# EAGLE board Ex EEPROM.SOP16 (EAGLE 7.6.0)
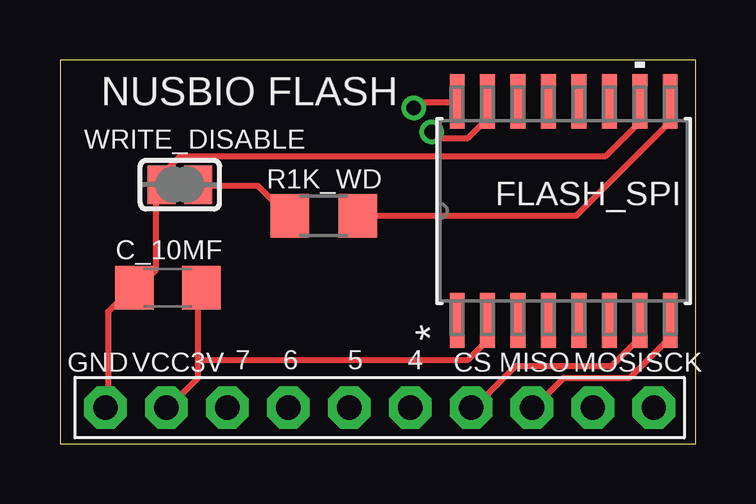
[diagram p0: board, top side]
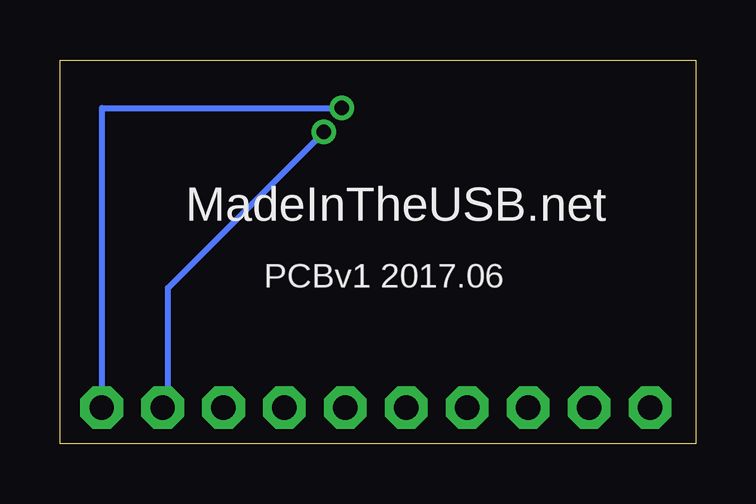
[diagram p1: board, bottom side, seen from below]

Size 26.5 x 16 mm. Coordinates in mm from the lower left corner, seen from the top.
Outline: 0,0 26.5,0 26.5,16 0,16 0,0
Copper layers (1*16): Top 0.035mm / dielectric 1.5mm / Bottom 0.035mm
Design rules "default": minimum track width 10mil, minimum drill 24mil, track to track 8mil, track to pad 8mil, pad to pad 8mil, via to via 8mil, smd to smd 8mil, copper to edge 40mil, drill to drill 8mil, minimum pad ring 10mil, minimum via ring 8mil, stop-mask expansion 4mil, vias tented up to drill 0mil, thermal gap 10mil

## Footprints (pad centres in the part's own frame; a part is rotated, then mirrored left to right if it is on the bottom)
C1206 = smd 1.6 x 1.8: 1 -1.4,0; 2 1.4,0
SL3016-M = smd 2.286 x 0.61: 1 -4.572,4.445; 2 -4.572,3.175; 3 -4.572,1.905; 4 -4.572,0.635; 5 -4.572,-0.635; 6 -4.572,-1.905; 7 -4.572,-3.175; 8 -4.572,-4.445; 9 4.572,-4.445; 10 4.572,-3.175; 11 4.572,-1.905; 12 4.572,-0.635; 13 4.572,0.635; 14 4.572,1.905; 15 4.572,3.175; 16 4.572,4.445
1X10-BIG = drill 1.016 pad 1.778 octagon: 1 -11.43,0; 2 -8.89,0; 3 -6.35,0; 4 -3.81,0; 5 -1.27,0; 6 1.27,0; 7 3.81,0; 8 6.35,0; 9 8.89,0; 10 11.43,0
R1206 = smd 1.6 x 1.803: 1 -1.422,0; 2 1.422,0
SOLDERJUMPER_REFLOW = smd 1.168 x 1.6: 1 -0.762,0; 2 0.762,0

## Placement (x,y rotation side)
C_10MF  [C1206]  4.5,6.5 180 top
FLASH_SPI  S70FL01GSAGMFI011SL3016-M  [SL3016-M]  21,9.7 90 top
NUSBIO_IN  PINHD-1X10  [1X10-BIG]  13.33,1.5 180 top
R1K_WD  [R1206]  11,9.5 0 top
WRITE_DISABLE  [SOLDERJUMPER_REFLOW]  5,10.8 0 top

## Library data of the parts
C_10MF NUSBIO_IN R1K_WD = adafruit
FLASH_SPI = MadeInTheUSB_Cypress_Flash_SOIC16; MANUFACTURER_PART_NUMBER: S70FL01GSAGMFI011; VENDOR: SPANSION
WRITE_DISABLE = microbuilder

## Nets
CS: FLASH_SPI.7 NUSBIO_IN.4
GND: C_10MF.2 FLASH_SPI.10 NUSBIO_IN.10 WRITE_DISABLE.1
GPIO5: NUSBIO_IN.5
GPIO6: NUSBIO_IN.6
GPIO7: NUSBIO_IN.7
GPIO8: NUSBIO_IN.8
MISO: FLASH_SPI.8 NUSBIO_IN.3
MOSI: FLASH_SPI.15 NUSBIO_IN.2
N$1: R1K_WD.1 WRITE_DISABLE.2
SCK: FLASH_SPI.16 NUSBIO_IN.1
VCC_3V: C_10MF.1 FLASH_SPI.2 NUSBIO_IN.9
WP: FLASH_SPI.9 R1K_WD.2

## Tracks (layer width: path | path; a pad name or v marks a point on that pad's centre or on a via)
CS
  Top 0.254: FLASH_SPI.7 24,5 24,4.25 23,3.25 19,3.25 17.25,1.5 NUSBIO_IN.4
GND
  Top 0.254: FLASH_SPI.10 24,14.25 24,13.25 22.75,12 5,12 4,11 WRITE_DISABLE.1 4,10.75 4,7.25 3.25,6.5 C_10MF.2 3,6.5 2,5.5 2,1.5 NUSBIO_IN.10
MISO
  Top 0.254: FLASH_SPI.8 25.25,5 25.25,4.25 23.75,2.75 21,2.75 19.75,1.5 NUSBIO_IN.3
MOSI  (via drill 0.61)
  Top 0.254: v15.5,13 15.75,12.75 17,12.75 17.75,13.5 17.75,14.25 FLASH_SPI.15
  Bottom 0.254: v15.5,13 22,6.5 22,1.5 NUSBIO_IN.2
N$1
  Top 0.254: WRITE_DISABLE.2 6,10.75 8.25,10.75 9.5,9.5 R1K_WD.1
SCK  (via drill 0.61)
  Top 0.254: v14.75,14 15,14.25 16.5,14.25 FLASH_SPI.16
  Bottom 0.254: v14.75,14 24.75,14 NUSBIO_IN.1
VCC_3V
  Top 0.254: 5.75,3.5 5.75,2.75 4.5,1.5 NUSBIO_IN.9 | 5.75,3.5 5.75,6.5 C_10MF.1 | 5.75,3.5 17,3.5 17.75,4.25 17.75,5 FLASH_SPI.2
WP
  Top 0.254: R1K_WD.2 21.5,9.5 25.25,13.25 25.25,14.25 FLASH_SPI.9

## Text on the board
tNames: NUSBIO FLASH | GND | VCC3V | 7 | 6 | 5 | 4 | CS | MISO | MOSI | SCK
bNames: MadeInTheUSB.net | PCBv1 2017.06